# Altium PCB ZQS_PCB_Project.PcbDoc
Units mil, origin at the board's own origin, x right, y up, seen from the top; angles counter-clockwise.
Board outline 3900 x 3900 mil, 2 copper layers (Top Layer, Bottom Layer); 53 components, 55 nets, 204 pads, 926 vias.
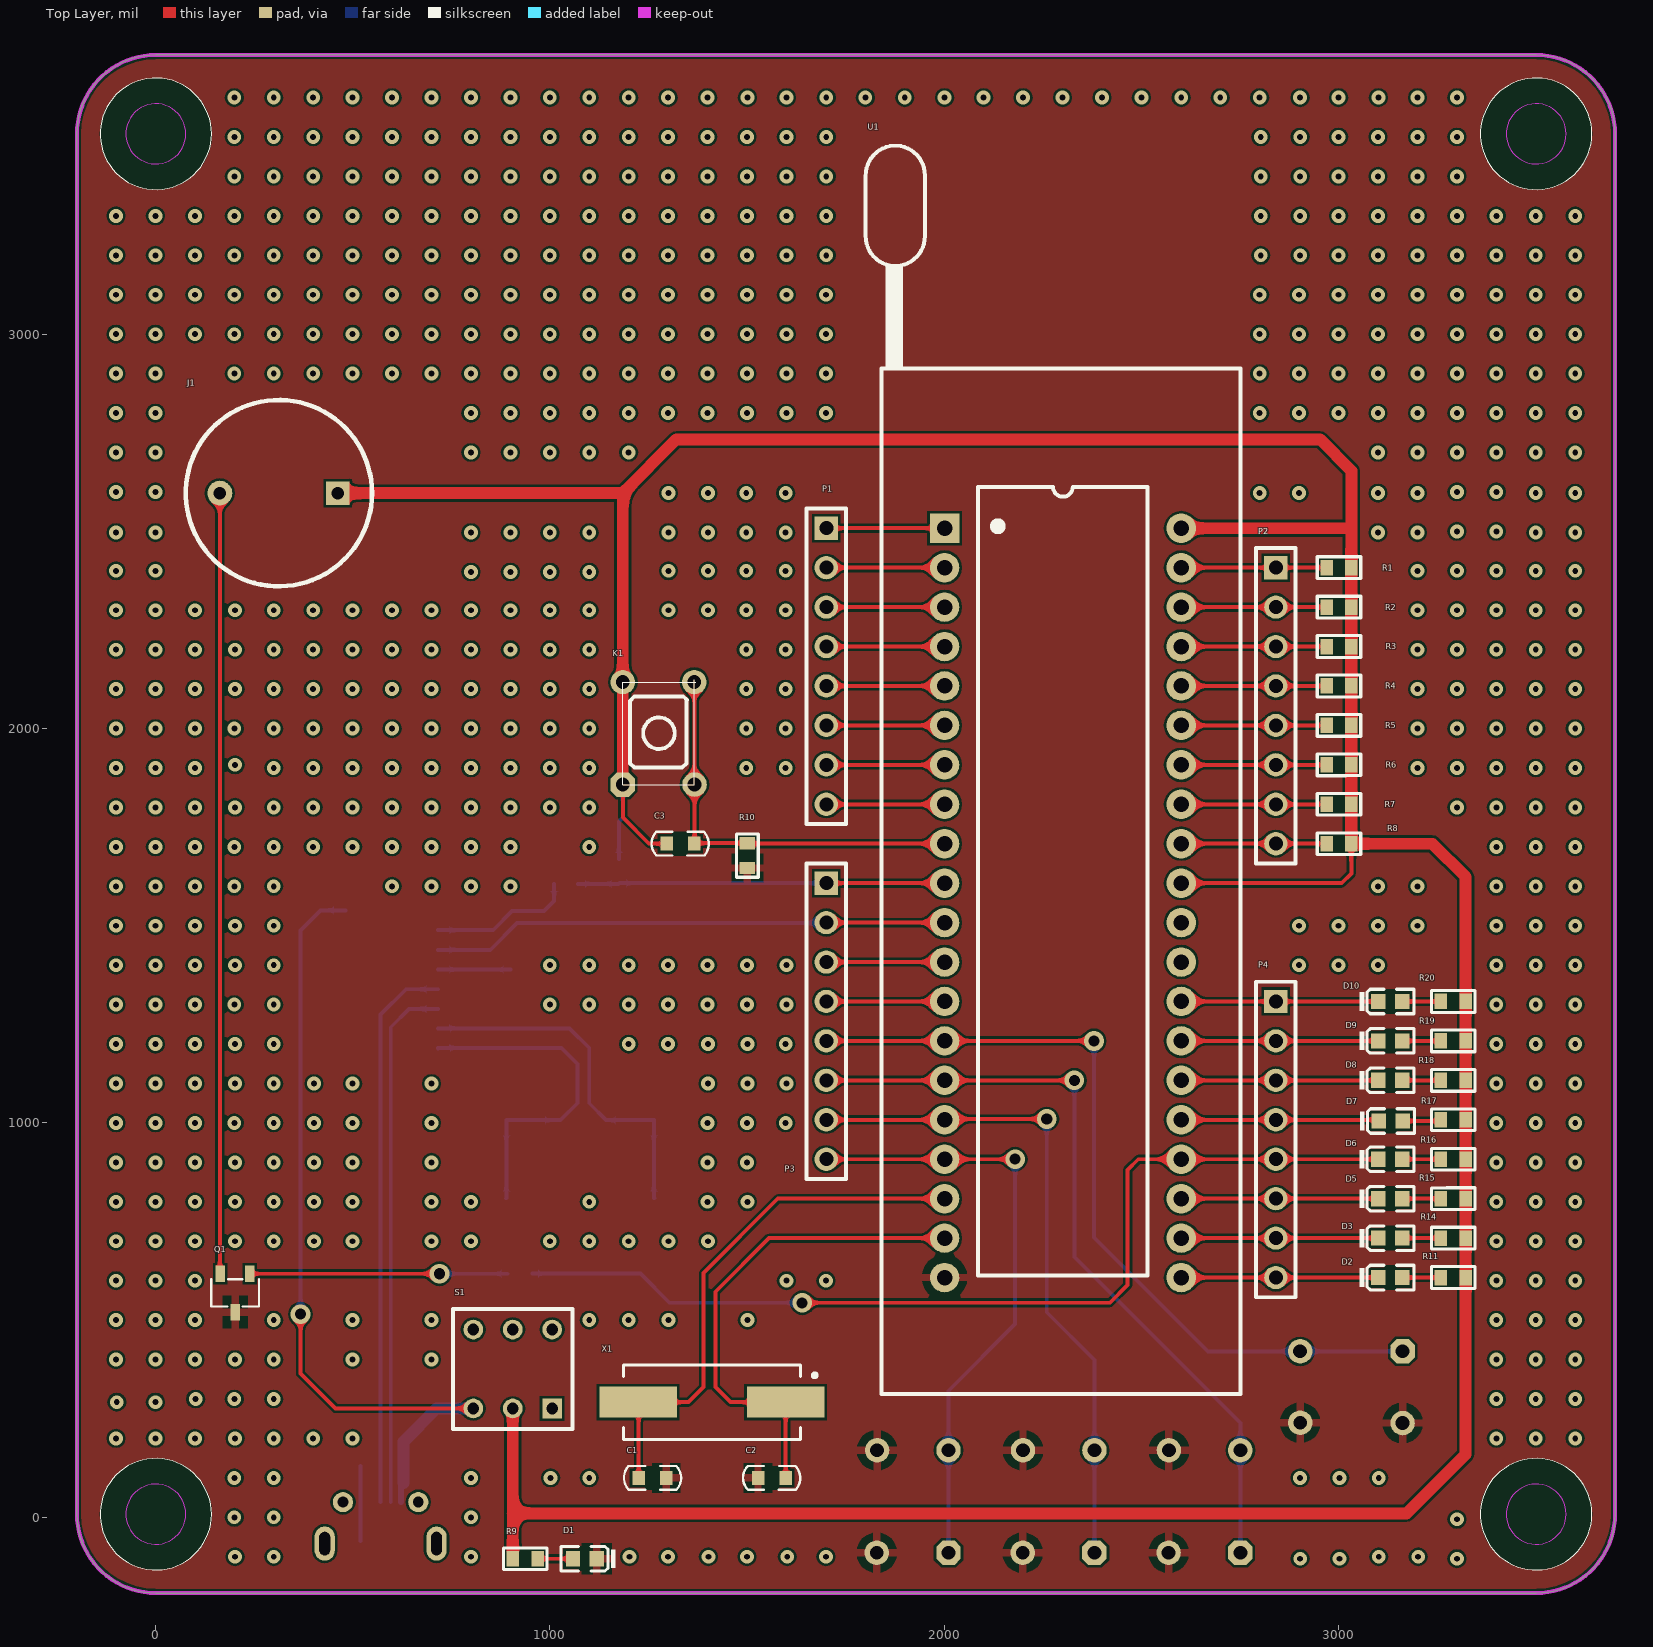
[diagram p0: Top Layer view]
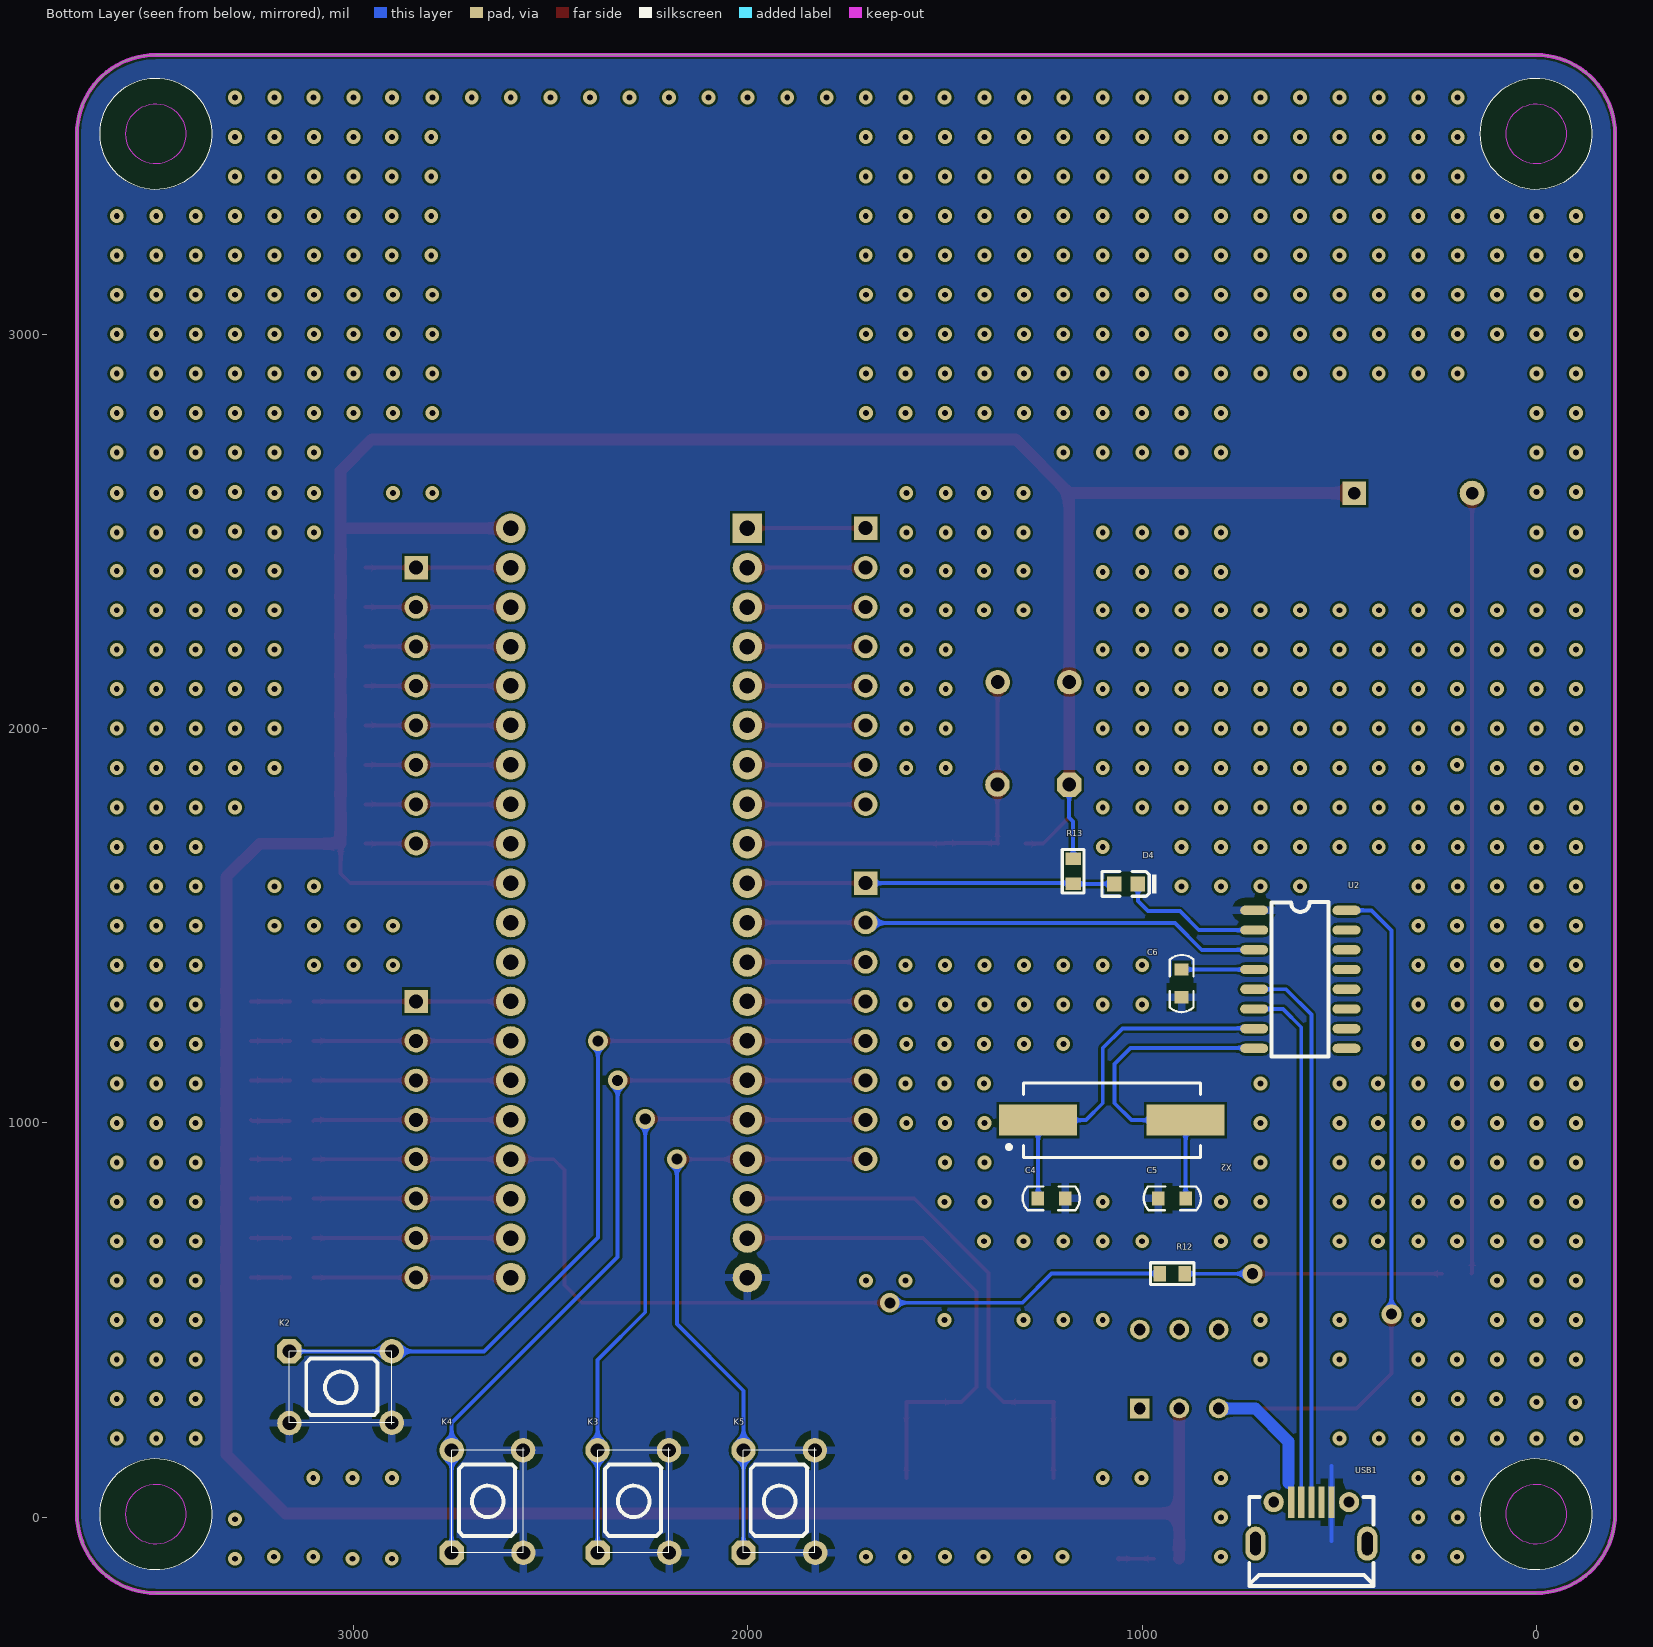
[diagram p1: Bottom Layer view, seen from below]

## Layer stack, top to bottom
Top Layer: signal copper 1.4
Dielectric: dielectric 12.6, FR-4, Dk 4.8
Bottom Layer: signal copper 1.4

## Board outline
1,-192 cw(c1,8) -199,8 -199,3508 cw(c1,3508) 1,3708 3501,3708 cw(c3501,3508) 3701,3508 3701,8 cw(c3501,8) 3501,-192

## Design rules (kind name [scope] priority, off if disabled: settings)
Clearance [All] p1: gap=6
PolygonConnect [All vs IsVia] p1: connectstyle=Relief reliefconductorwidth=10 reliefentries=4 polygonreliefangle="90 Angle" airgapwidth=10
PolygonConnect PolygonConnect_1 [All] p2: connectstyle=Relief reliefconductorwidth=20 reliefentries=4 polygonreliefangle="90 Angle" airgapwidth=20
RoutingVias [All] p1: holewidth=28 width=50 viastyle="Through Hole" minholewidth=8 minwidth=25 maxholewidth=28 maxwidth=50
SolderMaskExpansion [All] p1: expansion=4
Width VCC [InNet('VCC')] p1: maxlimit=30 minlimit=10 preferedwidth=30
Width GND [InNet('GND')] p2: maxlimit=40 minlimit=10 preferedwidth=40
Width [All] p3: maxlimit=40 minlimit=10 preferedwidth=10
28 further rules are at their usual default settings.

## Components (designator, comment, footprint, x,y, rotation, side; value= is the part's Value field where it differs from the comment)
C1 "22pF" C0603 1260,100 r180 top
C2 "22pF" C0603 1563,100 r0 top
C3 "10uF" C0603 1331,1708 r0 top
C4 "22pF" C0603 1230,809 r180 bottom
C5 "22pF" C0603 924,809 r0 bottom
C6 "0.1uF" C0603 900,1354 r90 bottom
D1 "LED" LED-G 1089,-105 r0 top
D2 "LED" LED-B 3131,608 r180 top
D3 "LED" LED-B 3131,708 r180 top
D4 "LED" LED-G 1041,1606 r180 bottom
D5 "LED" LED-G 3131,808 r180 top
D6 "LED" LED-G 3131,908 r180 top
D7 "LED" LED-R 3132,1005 r180 top
D8 "LED" LED-R 3131,1108 r180 top
D9 "LED" LED-Y 3131.16,1208 r180 top
D10 "LED" LED-Y 3131.16,1308 r180 top
J1 "Buzzer" Buzzer 313,2597 r0 top
K1 "KEY" KEY 1276.05,1987.88 r0 top
K2 "KEY" KEY 3032.5,330 r270 bottom
K3 "KEY" KEY 2290,40 r180 bottom
K4 "KEY" KEY 2660,40 r180 bottom
K5 "KEY" KEY 1920,40 r180 bottom
P1 "Header" HDR2.54-M-LI-8P 1701,2508 r270 top
P2 "Header" HDR2.54-M-LI-8P 2841,2408 r270 top
P3 "Header" HDR2.54-M-LI-8P 1701,1608 r270 top
P4 "Header" HDR2.54-M-LI-8P 2841,1308 r270 top
Q1 "8550" SOT-23-3 202,569 r90 top
R1 "1K" R0603 3001,2408 r0 top
R2 "1K" R0603 3001,2308 r0 top
R3 "1K" R0603 3001,2208 r0 top
R4 "1K" R0603 3001,2108 r0 top
R5 "1K" R0603 3001,2008 r0 top
R6 "1K" R0603 3001,1908 r0 top
R7 "1K" R0603 3001,1808 r0 top
R8 "1K" R0603 3001,1708 r0 top
R9 "1K" R0603 938,-105 r0 top
R10 "10K" R0603 1501,1678 r270 top
R11 "1K" R0603 3291,608 r180 top
R12 "1K" R0603 924,618 r180 bottom
R13 "10K" R0603 1175,1638 r90 bottom
R14 "1K" R0603 3291,708 r180 top
R15 "1K" R0603 3291,808 r180 top
R16 "1K" R0603 3291,908 r180 top
R17 "1K" R0603 3291,1008 r180 top
R18 "1K" R0603 3291,1108 r180 top
R19 "1K" R0603 3291,1208 r180 top
R20 "1K" R0603 3291,1308 r180 top
S1 "" swtich-6pin 1006,276 r0 top
U1 "STC89C5xx" STC89C5X 2301,1558 r0 top
U2 "CH340G" SOIC-16_150mil 599,1364 r270 bottom
USB1 "USB-MINI/MICRO" USB-MICRO2 571,-14 r270 bottom
X1 "12MHZ" XTAL_HC49SMD 1598,292 r180 top
X2 "11.0592MHZ" XTAL_HC49SMD 1264,1007 r180 bottom

## Footprints (in the part's own frame and the unit in brackets; to place one, negate y for a bottom-side part, rotate by r counter-clockwise, add the part's x,y. Pads: shape width x height; smd on the part's side, far side on the other; paste and mask are expansions set on the pad)
Buzzer [mm]
  rect 1.5x1.5 hole 0.8: 1(3.8,0)
  round 1.6 hole 0.8: 2(-3.8,0)
  silkscreen extent -6,-6 6,6, body extent -6,-6 9.45,6, height 9.75
C0603 [mm]
  rect 0.8x0.9 smd: 1(-0.889,0) 2(0.889,0)
  Top Layer pour cut-out: -0.508,0.762 0.457,0.762 0.457,-0.75 0.445,-0.762 -0.508,-0.762
  silkscreen extent -1.86,-0.76 1.82,0.76, body extent -0.75,-0.39 0.85,0.41, height 0.45
HDR2.54-M-LI-8P [mm]
  rect 1.5x1.5 hole 0.9: 1(0,0)
  round 1.5 hole 0.9: 2(2.54,0) 3(5.08,0) 4(7.62,0) 5(10.16,0) 6(12.7,0) 7(15.24,0) 8(17.78,0)
  silkscreen extent -1.27,-1.27 19.05,1.27, body extent -1.27,-1.27 19.05,1.27, height 8.54
KEY [mil]
  oct 62x62 hole 35: 1(-90.95,-129.96)
  round 62 hole 35: 1(-90.94,129.96) 2(90.16,129.88) 2(90.95,-129.88)
  silkscreen extent -91,-130 94,136, body extent -123,-156 121,156, height 157
LED-B [mm]
  rect 0.93x0.98 smd: 1(-0.766,0) 2(0.766,0)
  Top Layer pour cut-out: -0.404,0.79 -0.404,-0.79 0.396,-0.79 0.396,0.79
  silkscreen extent -1.54,-0.79 1.97,0.79, body extent -0.8,-0.4 0.8,0.4, height 0.6
LED-G [mm]
  rect 0.93x0.98 smd: 1(-0.766,0) 2(0.766,0)
  Top Layer pour cut-out: -0.404,0.79 -0.404,-0.79 0.396,-0.79 0.396,0.79
  silkscreen extent -1.54,-0.79 1.97,0.79, body extent -0.8,-0.4 0.8,0.4, height 0.6
LED-R [mm]
  rect 0.93x0.98 smd: 1(-0.766,0) 2(0.766,0)
  Top Layer pour cut-out: -0.404,0.79 -0.404,-0.79 0.396,-0.79 0.396,0.79
  silkscreen extent -1.54,-0.79 1.97,0.79, body extent -0.8,-0.4 0.8,0.4, height 0.6
LED-Y [mm]
  rect 0.93x0.98 smd: 1(-0.762,0) 2(0.77,0)
  Top Layer pour cut-out: -0.4,0.79 -0.4,-0.79 0.4,-0.79 0.4,0.79
  silkscreen extent -1.53,-0.79 1.97,0.79, body extent -0.8,-0.4 0.8,0.4, height 0.6
R0603 [mm]
  rect 0.8x1 smd: 1(-0.8,0) 2(0.8,0)
  Top Layer pour cut-out: -0.432,0.7 -0.432,-0.7 0.451,-0.7 0.451,0.681 0.432,0.7
  silkscreen extent -1.4,-0.7 1.4,0.7, body extent -0.8,-0.37 0.8,0.43, height 0.45
SOIC-16_150mil [mm]
  oval 0.6x1.8 smd: 1(-4.445,-2.972) 2(-3.175,-2.972) 3(-1.905,-2.972) 4(-0.635,-2.972) 5(0.635,-2.972) 6(1.905,-2.972) 7(3.175,-2.972) 8(4.445,-2.972) 9(4.445,2.972) 10(3.175,2.972) 11(1.905,2.972) 12(0.635,2.972) 13(-0.635,2.972) 14(-1.905,2.972) 15(-3.175,2.972) 16(-4.445,2.972)
  silkscreen extent -4.98,-1.85 4.98,1.83, body extent -5.1,-3.03 5.1,2.97, height 1.7
SOT-23-3 [mm]
  rect 1.07x0.6 smd mask+0.051: 1(1.235,-0.95) 2(1.235,0.95) 3(-1.235,0)
  silkscreen extent -0.88,-1.54 0.88,1.54, body extent -1.12,-1.51 1.38,1.49, height 1.08
STC89C5X [mm]
  rect 1.9x1.9 hole 1: 1(-7.62,24.13)
  round 1.9 hole 1: 2(-7.62,21.59) 3(-7.62,19.05) 4(-7.62,16.51) 5(-7.62,13.97) 6(-7.62,11.43) 7(-7.62,8.89) 8(-7.62,6.35) 9(-7.62,3.81) 10(-7.62,1.27) 11(-7.62,-1.27) 12(-7.62,-3.81) 13(-7.62,-6.35) 14(-7.62,-8.89) 15(-7.62,-11.43) 16(-7.62,-13.97) 17(-7.62,-16.51) 18(-7.62,-19.05) 19(-7.62,-21.59) 20(-7.62,-24.13) 21(7.62,-24.13) 22(7.62,-21.59) 23(7.62,-19.05) 24(7.62,-16.51) 25(7.62,-13.97) 26(7.62,-11.43) 27(7.62,-8.89) 28(7.62,-6.35) 29(7.62,-3.81) 30(7.62,-1.27) 31(7.62,1.27) 32(7.62,3.81) 33(7.62,6.35) 34(7.62,8.89) 35(7.62,11.43) 36(7.62,13.97) 37(7.62,16.51) 38(7.62,19.05) 39(7.62,21.59) 40(7.62,24.13)
  silkscreen extent -12.7,-31.62 11.43,48.76, body extent -12.84,-31.38 11.31,49.02, height 16.64
swtich-6pin [mil]
  rect 50x50 hole 30: 1(0,0)
  round 50 hole 30: 2(-100,0) 3(-200,0) 4(-200,200) 5(-100,200) 6(0,200)
  silkscreen extent -252,-52 52,252, body extent -257,-57 57,257, height 355
USB-MICRO2 [mm]
  rect 2x0.4 smd: 1(-1.327,-1.3) 2(-1.327,-0.65) 3(-1.327,0) 4(-1.327,0.65) 5(-1.327,1.3)
  round 1.3 hole 0.7: 6(-1.335,2.425) 9(-1.335,-2.425)
  oval 2.2x1.3 hole 0.7 slot 1.5 at 0 deg: 7(1.335,3.6) 8(1.335,-3.6)
  silkscreen extent -1.68,-4 4.07,4, body extent -1.94,-4.34 3.96,4.31, height 2.76
XTAL_HC49SMD [mm]
  rect 5x2 smd: 1(0,0) 2(9.5,0)
  silkscreen extent -2,-2.4 10.45,2.4, body extent -1.95,-2.46 11.45,2.44, height 4

## Part data
C1 C2 C3 C4 C5 C6: library part CAP
P1 P2 P3 P4: library part Header1x8
Q1: library part Triode-3
R1 R2 R3 R4 R5 R6 R7 R8 R9 R10 R11 R12 R13 R14 R15 R16 R17 R18 R19 R20: library part RES
S1: library part SWITCH-6PIN
USB1: library part USB-MICRO
X1 X2: library part XTAL

## Via types
v1: diameter 35, hole 15, Top Layer to Bottom Layer, 919 vias
v2: diameter 50, hole 28, Top Layer to Bottom Layer, 7 vias

## Nets (pads, with @x,y where several pads share a name; then routed paths per layer and width w, separated by ;. In a path a pad name is that pad's centre, name@x,y a point inside that pad or via, vN(x,y) a via of type N, cw(c..) or ccw(c..) an arc to the next point about the centre after c; other vN are vias at no path point)
GND: C1.1 C2.1 C4.2 C5.2 C6.1 D1.2 K2.2 K3.2 K4.2 K5.2 Q1.3 R10.2 U1.20 U2.1 USB1.5 | length 190.1
  Bottom Layer w10: 520,-60 519.82,-59.82 USB1.5 519.82,129.82 520,130
NetC6_2: C6.2 U2.4 | length 184
  Bottom Layer w10: U2.4 C6.2
NetD1_1: D1.1 R9.2 | length 89.3
  Top Layer w10: R9.2 D1.1
NetD2_1: D2.1 R11.2 | length 98.3
  Top Layer w10: D2.1 R11.2
NetD3_1: D3.1 R14.2 | length 98.3
  Top Layer w10: D3.1 R14.2
NetD4_2: D4.2 U2.2 | length 368.6
  Bottom Layer w10: U2.2 856.57,1489 904.57,1537 985,1537 1010.84,1562.84 D4.2
NetD5_1: D5.1 R15.2 | length 98.3
  Top Layer w10: D5.1 R15.2
NetD6_1: D6.1 R16.2 | length 98.3
  Top Layer w10: D6.1 R16.2
NetD7_1: D7.1 R17.2 | length 98.6
  Top Layer w10: D7.1 3256.5,1005 R17.2
NetD8_1: D8.1 R18.2 | length 98.3
  Top Layer w10: D8.1 R18.2
NetD9_1: D9.1 R19.2 | length 98.3
  Top Layer w10: D9.1 R19.2
NetD10_1: D10.1 R20.2 | length 98.3
  Top Layer w10: D10.1 R20.2
NetJ1_2: J1.2 Q1.2 | length 1981
  Top Layer w10: J1.2 163.39,618.83 Q1.2 ; J1.2@164.6,2609.21 J1.2@165.39,2610
NetQ1_1: Q1.1 R12.2 | length 652.7
  Top Layer w10: Q1.1 v2(720,617.62)
  Bottom Layer w10: v2(720,617.62) R12.2@892.13,617.62
P00: P2.1 R1.1 U1.39 | length 368.5
  Top Layer w10: U1.39 P2.1 R1.1
P01: P2.2 R2.1 U1.38 | length 368.5
  Top Layer w10: U1.38 P2.2 R2.1
P02: P2.3 R3.1 U1.37 | length 368.5
  Top Layer w10: U1.37 P2.3 R3.1
P03: P2.4 R4.1 U1.36 | length 368.5
  Top Layer w10: U1.36 P2.4 R4.1
P04: P2.5 R5.1 U1.35 | length 368.5
  Top Layer w10: U1.35 P2.5 R5.1
P05: P2.6 R6.1 U1.34 | length 368.5
  Top Layer w10: U1.34 P2.6 R6.1
P06: P2.7 R7.1 U1.33 | length 368.5
  Top Layer w10: U1.33 P2.7 R7.1
P07: P2.8 R8.1 U1.32 | length 368.5
  Top Layer w10: U1.32 P2.8 R8.1
P10: P1.1 U1.1 | length 300
  Top Layer w10: P1.1 U1.1
P11: P1.2 U1.2 | length 300
  Top Layer w10: P1.2 U1.2
P12: P1.3 U1.3 | length 300
  Top Layer w10: P1.3 U1.3
P13: P1.4 U1.4 | length 300
  Top Layer w10: P1.4 U1.4
P14: P1.5 U1.5 | length 300
  Top Layer w10: P1.5 U1.5
P15: P1.6 U1.6 | length 300
  Top Layer w10: P1.6 U1.6
P16: P1.7 U1.7 | length 300
  Top Layer w10: P1.7 U1.7
P17: P1.8 U1.8 | length 300
  Top Layer w10: P1.8 U1.8
P20: D2.2 P4.8 U1.21 | length 499.8
  Top Layer w10: U1.21 P4.8 D2.2
P21: D3.2 P4.7 U1.22 | length 499.8
  Top Layer w10: U1.22 P4.7 D3.2
P22: D5.2 P4.6 U1.23 | length 499.8
  Top Layer w10: U1.23 P4.6 D5.2
P23: D6.2 P4.5 R12.1 U1.24 | length 2497.8
  Top Layer w10: v2(1640,544) 2420,544 2465,589 2465,881 2492,908 U1.24 P4.5 D6.2
  Bottom Layer w10: R12.1 1230,618 1304,544 v2(1640,544)
P24: D7.2 P4.4 U1.25 | length 502.1
  Top Layer w10: U1.25 P4.4 3098.84,1008 D7.2
P25: D8.2 P4.3 U1.26 | length 499.8
  Top Layer w10: U1.26 P4.3 D8.2
P26: D9.2 P4.2 U1.27 | length 499.8
  Top Layer w10: U1.27 P4.2 D9.2
P27: D10.2 P4.1 U1.28 | length 499.8
  Top Layer w10: U1.28 P4.1 D10.2
P30: D4.1 P3.1 R13.1 U1.10 | length 928.6
  Top Layer w10: P3.1 U1.10
  Bottom Layer w10: D4.1 1174.5,1606 R13.1 ; R13.1@1176.5,1608 P3.1
P31: P3.2 U1.11 U2.3 | length 1313.6
  Top Layer w10: P3.2 U1.11
  Bottom Layer w10: U2.3 849,1439 917,1507 1700,1507 P3.2
P32: P3.3 U1.12 | length 300
  Top Layer w10: P3.3 U1.12
P33: P3.4 U1.13 | length 300
  Top Layer w10: P3.4 U1.13
P34: K2.1 P3.5 U1.14 | length 2079.2
  Top Layer w10: P3.5 U1.14 v2(2380,1208)
  Bottom Layer w10: v2(2380,1208) 2380,710 2669.06,420.94 2902.53,420.94 K2.1@3162.46,420.94
P35: K4.1 P3.6 U1.15 | length 2001.3
  Top Layer w10: P3.6 U1.15 v2(2330,1108)
  Bottom Layer w10: v2(2330,1108) 2330,660 2750.94,239.06 2750.94,169.96 K4.1@2750.95,-89.96
P36: K3.1 P3.7 U1.16 | length 1709.9
  Top Layer w10: P3.7 U1.16 2003,1010 v2(2260,1010)
  Bottom Layer w10: v2(2260,1010) 2260,520 2380.94,399.06 2380.94,169.96 K3.1@2380.94,-89.96
P37: K5.1 P3.8 U1.17 | length 1547
  Top Layer w10: P3.8 U1.17 v2(2180,908)
  Bottom Layer w10: K5.1@2010.94,-89.96 2010.94,169.96 2010.94,320.94 2180,490 v2(2180,908)
RST: C3.2 K1.2 R10.1 U1.9 | length 1045.3
  Top Layer w10: C3.2 C3.2@1367,1709 ; K1.2@1366.21,2117.76 1366.61,2117.36 1366.61,1858.39 1367,1858 C3.2@1367,1709 ; U1.9 1502.5,1708 R10.1 1367.5,1709.5 C3.2@1367,1709
UD+: U2.5 USB1.3 | length 1408.3
  Bottom Layer w10: USB1.3 571,1275 635,1339 U2.5
UD-: U2.6 USB1.2 | length 1343
  Bottom Layer w10: USB1.2 596.59,1242.59 643,1289 U2.6
VCC: C3.1 J1.1 K1.1 R1.2 R2.2 R3.2 R4.2 R5.2 R6.2 R7.2 R8.2 R9.1 R11.1 R13.2 R14.1 R15.1 R16.1 R17.1 R18.1 R19.1 R20.1 S1.2 U1.31 U1.40 | length 10350.1
  Top Layer w10: K1.1@1185.11,1857.91 1185.11,1774.89 1252,1708 C3.1 ; U1.31 3008,1608 3032.5,1632.5 R8.2
  Top Layer w30: J1.1 1185,2597 1185.11,2597.11 ; S1.2 906,10 ; R9.1 906,-104.5 906,10 ; K1.1@1185.11,1857.92 1185.11,2117.84 1185.11,2597.11 ; U1.40 3027.99,2508 ; 906,10 3172.5,10 3322,159.5 3322,1624 3238,1708 R8.2 R7.2 R6.2 R5.2 R4.2 R3.2 R2.2 R1.2 3032.5,2653.5 2953,2733 1321,2733 1185.11,2597.11
  Bottom Layer w10: R13.2 1175,1764 1185.11,1774.11 K1.1@1185.11,1857.91
VCC_5V: S1.3 U2.16 USB1.1 | length 2101.4
  Top Layer w10: v2(368,515) 368,365 457,276 S1.3
  Bottom Layer w10: v2(368,515) 368,1488 419,1539 U2.16
  Bottom Layer w15: USB1.1 622.18,80.18 629,87
  Bottom Layer w30: 629,87 629,192 713,276 S1.3
X1: C2.2 U1.19 X1.1 | length 1265.1
  Top Layer w10: C2.2 X1.1 1458,292 1420,330 1420,572 1556,708 U1.19
X2: C1.2 U1.18 X1.2 | length 1353
  Top Layer w10: C1.2 1225,290.99 X1.2 1352,292 1390,330 1390,620 1578,808 U1.18
XI: C4.1 U2.7 X2.1 | length 923.9
  Bottom Layer w10: U2.7@717,1240 1050,1240 1100,1190 1100,1050 1143,1007 X2.1 1264,810 C4.1
XO: C5.1 U2.8 X2.2 | length 867.2
  Bottom Layer w10: U2.8 717,1190 1030,1190 1070,1150 1070,1050 1027,1007 X2.2 889.99,809.99 C5.1
pads on no net: S1.1 S1.4 S1.5 S1.6 U1.29 U1.30 U2.9 U2.10 U2.11 U2.12 U2.13 U2.14 U2.15 USB1.4 USB1.6 USB1.7 USB1.8 USB1.9
copper on no net:
  other v1: 2902.62,-105 2902.62,-105 3002.62,-105 3002.62,-105 3300,-105 3300,-105 202,-100 300,-100 800,-100 1202,-100 1202,-100 1300,-100 1300,-100 1402,-100 1402,-100 1500,-100 1500,-100 1602,-100 1602,-100 1700,-100 1700,-100 3101.84,-100 3101.84,-100 3201.84,-100 3201.84,-100 3300,-5 3300,-5 200,0 300,0 800,0 200,100 300,100 800,100 1002,100 1002,100 1100,100 1100,100 2902.53,100 2902.53,100 3002.53,100 3002.53,100 3101.84,100 -100,200 0,200 100,200 202,200 300,200 400,200 500,200 3400,200 3500,200 3600,200 -98,292 -98,292 0,292 0,292 102,300 102,300 200,300 200,300 300,300 3400,300 3400,300 3500,300 3500,300 3600,300 3600,300 -100,400 0,400 100,400 202,400 300,400 500,400 700,400 3400,400 3500,400 3600,400 -100,500 0,500 0,500 100,500 100,500 300,500 500,500 700,500 1100,500 1200,500 1301,500 1501,500 3400,500 3400,500 3500,500 3500,500 3600,500 3600,500 -100,600 0,600 100,600 1600,600 1700,600 3400,600 3500,600 3600,600 -100,700 0,700 0,700 100,700 100,700 202,700 202,700 300,700 300,700 402,700 402,700 500,700 500,700 700,700 800,700 1000,700 1100,700 1200,700 1301,700 1401,700 3400,700 3400,700 3500,700 3500,700 3600,700 3600,700 -100,800 0,800 100,800 202,800 202,800 300,800 300,800 402,800 402,800 500,800 500,800 700,800 800,800 1100,800 1400,800 1501,800 3400,800 3500,800 3600,800 -100,900 0,900 0,900 100,900 100,900 202,900 202,900 300,900 300,900 402,900 402,900 500,900 500,900 700,900 1400,900 1500,900 3400,900 3500,900 3600,900 -100,1000 0,1000 100,1000 200,1000 300,1000 402,1000 402,1000 500,1000 500,1000 700,1000 1400,1000 1400,1000 1500,1000 1500,1000 1598,1000 3400,1000 3500,1000 3600,1000 -100,1100 0,1100 0,1100 100,1100 100,1100 202,1100 202,1100 300,1100 300,1100 402,1100 402,1100 500,1100 500,1100 700,1100 1401,1100 1501,1100 1600,1100 3400,1100 3500,1100 3600,1100 -100,1200 0,1200 100,1200 202,1200 202,1200 300,1200 300,1200 1200,1200 1300,1200 1401,1200 1401,1200 1501,1200 1501,1200 1598,1200 3400,1200 3500,1200 3600,1200 -100,1300 0,1300 0,1300 100,1300 100,1300 200,1300 300,1300 1000,1300 1100,1300 1200,1300 1300,1300 1400,1300 1500,1300 1600,1300 3400,1300 3500,1300 3600,1300 -100,1400 0,1400 100,1400 202,1400 202,1400 300,1400 300,1400 1000,1400 1100,1400 1100,1400 1200,1400 1200,1400 1300,1400 1300,1400 1400,1400 1400,1400 1500,1400 1500,1400 1600,1400 1600,1400 2900,1400 2900,1400 3000,1400 3000,1400 3100,1400 3100,1400 3400,1400 3500,1400 3600,1400 -100,1500 0,1500 0,1500 100,1500 100,1500 202,1500 202,1500 300,1500 300,1500 2900,1500 3000,1500 3100,1500 3200,1500 3200,1500 3400,1500 3500,1500 3600,1500 -100,1600 0,1600 100,1600 200,1600 300,1600 600,1600 700,1600 800,1600 900,1600 3100,1600 3200,1600 3200,1600 3400,1600 3500,1600 3600,1600 -100,1700 0,1700 0,1700 100,1700 100,1700 200,1700 200,1700 300,1700 300,1700 400,1700 500,1700 600,1700 600,1700 700,1700 700,1700 800,1700 900,1700 1100,1700 3400,1700 3400,1700 3500,1700 3500,1700 3600,1700 3600,1700 -100,1800 0,1800 100,1800 202,1800 300,1800 400,1800 500,1800 600,1800 700,1800 800,1800 900,1800 1000,1800 1100,1800 3300,1800 3400,1800 3500,1800 3600,1800 -100,1900 0,1900 0,1900 100,1900 100,1900 300,1900 300,1900 400,1900 400,1900 500,1900 500,1900 600,1900 600,1900 700,1900 700,1900 800,1900 800,1900 900,1900 900,1900 1000,1900 1000,1900 1100,1900 1498,1900 1598,1900 3200,1900 3200,1900 3300,1900 3300,1900 3400,1900 3400,1900 3500,1900 3500,1900 3600,1900 3600,1900 202,1908 -100,2000 0,2000 100,2000 200,2000 300,2000 400,2000 500,2000 600,2000 700,2000 800,2000 900,2000 1000,2000 1100,2000 1498,2000 1498,2000 1598,2000 1598,2000 3200,2000 3300,2000 3400,2000 3500,2000 3600,2000 -100,2100 0,2100 0,2100 100,2100 100,2100 202,2100 300,2100 300,2100 400,2100 400,2100 500,2100 500,2100 600,2100 600,2100 700,2100 700,2100 800,2100 800,2100 900,2100 900,2100 1000,2100 1000,2100 1100,2100 1100,2100 1498,2100 1598,2100 3200,2100 3200,2100 3300,2100 3300,2100 3400,2100 3400,2100 3500,2100 3500,2100 3600,2100 3600,2100 -100,2200 0,2200 100,2200 202,2200 300,2200 400,2200 500,2200 600,2200 700,2200 800,2200 900,2200 1000,2200 1100,2200 1498,2200 1498,2200 1598,2200 1598,2200 3200,2200 3300,2200 3400,2200 3500,2200 3600,2200 -100,2300 0,2300 0,2300 100,2300 100,2300 202,2300 300,2300 300,2300 400,2300 400,2300 500,2300 500,2300 600,2300 600,2300 700,2300 700,2300 800,2300 800,2300 900,2300 900,2300 1000,2300 1000,2300 1100,2300 1100,2300 1301,2300 1401,2300 1498,2300 1598,2300 3200,2300 3200,2300 3300,2300 3300,2300 3400,2300 3400,2300 3500,2300 3500,2300 3600,2300 3600,2300 800,2397 900,2397 1000,2397 1100,2397 -100,2400 -100,2400 0,2400 0,2400 1301,2400 1301,2400 1401,2400 1401,2400 1498,2400 1498,2400 1598,2400 1598,2400 3200,2400 3300,2400 3400,2400 3500,2400 3600,2400 -100,2497 -100,2497 0,2497 0,2497 800,2497 800,2497 900,2497 900,2497 1000,2497 1000,2497 1100,2497 1100,2497 1301,2497 1401,2497 1498,2497 1598,2497 3100,2497 3100,2497 3200,2497 3500,2497 3500,2497 3600,2497 3300,2500 3300,2500 3400,2500 1301,2597 1301,2597 1401,2597 1401,2597 1498,2597 1498,2597 1598,2597 1598,2597 2800,2597 2800,2597 2900,2597 2900,2597 3100,2597 3200,2597 3500,2597 3600,2597 -100,2600 -100,2600 0,2600 0,2600 3300,2600 3400,2600 -100,2700 -100,2700 0,2700 0,2700 800,2700 900,2700 1000,2700 1100,2700 1200,2700 1200,2700 3100,2700 3200,2700 3200,2700 3300,2700 3400,2700 3400,2700 3500,2700 3600,2700 -100,2800 -100,2800 0,2800 0,2800 800,2800 800,2800 900,2800 900,2800 1000,2800 1000,2800 1100,2800 1100,2800 1200,2800 1200,2800 1300,2800 1400,2800 1500,2800 1600,2800 1700,2800 1700,2800 2800,2800 2800,2800 2900,2800 3000,2800 3000,2800 3100,2800 3200,2800 3300,2800 3400,2800 3400,2800 3500,2800 3600,2800 3600,2800 -100,2900 -100,2900 0,2900 0,2900 200,2900 200,2900 300,2900 300,2900 400,2900 400,2900 500,2900 500,2900 600,2900 600,2900 700,2900 700,2900 800,2900 800,2900 900,2900 900,2900 1000,2900 1000,2900 1100,2900 1200,2900 1300,2900 1300,2900 1400,2900 1400,2900 1500,2900 1500,2900 1600,2900 1600,2900 1700,2900 1700,2900 2800,2900 2900,2900 3000,2900 3100,2900 3200,2900 3200,2900 3300,2900 3400,2900 3500,2900 3600,2900 -100,3000 -100,3000 0,3000 100,3000 200,3000 300,3000 400,3000 500,3000 600,3000 700,3000 800,3000 900,3000 1000,3000 1100,3000 1100,3000 1200,3000 1200,3000 1300,3000 1400,3000 1500,3000 1600,3000 1700,3000 1700,3000 2800,3000 2800,3000 2900,3000 3000,3000 3000,3000 3100,3000 3200,3000 3300,3000 3400,3000 3400,3000 3500,3000 3600,3000 3600,3000 -100,3100 -100,3100 0,3100 0,3100 100,3100 100,3100 200,3100 200,3100 300,3100 300,3100 400,3100 400,3100 500,3100 500,3100 600,3100 600,3100 700,3100 700,3100 800,3100 800,3100 900,3100 900,3100 1000,3100 1000,3100 1100,3100 1200,3100 1300,3100 1300,3100 1400,3100 1400,3100 1500,3100 1500,3100 1600,3100 1600,3100 1700,3100 1700,3100 2800,3100 2900,3100 3000,3100 3100,3100 3200,3100 3200,3100 3300,3100 3400,3100 3500,3100 3600,3100 -100,3200 -100,3200 0,3200 100,3200 200,3200 300,3200 400,3200 500,3200 600,3200 700,3200 800,3200 900,3200 1000,3200 1100,3200 1100,3200 1200,3200 1200,3200 1300,3200 1400,3200 1500,3200 1600,3200 1701,3200 1701,3200 2802.62,3200 2802.62,3200 2902.62,3200 3000,3200 3000,3200 3100,3200 3200,3200 3300,3200 3400,3200 3400,3200 3500,3200 3600,3200 3600,3200 -100,3300 -100,3300 0,3300 0,3300 100,3300 100,3300 200,3300 200,3300 300,3300 300,3300 400,3300 400,3300 500,3300 500,3300 600,3300 600,3300 700,3300 700,3300 800,3300 800,3300 900,3300 900,3300 1000,3300 1000,3300 1100,3300 1200,3300 1300,3300 1300,3300 1400,3300 1400,3300 1500,3300 1500,3300 1600,3300 1600,3300 1701,3300 1701,3300 2802.62,3300 2902.62,3300 3000,3300 3100,3300 3200,3300 3200,3300 3300,3300 3400,3300 3500,3300 3600,3300 200,3400 300,3400 400,3400 500,3400 600,3400 700,3400 800,3400 900,3400 1000,3400 1100,3400 1100,3400 1200,3400 1200,3400 1300,3400 1400,3400 1500,3400 1600,3400 1701,3400 1701,3400 2802.62,3400 2802.62,3400 2902.62,3400 3000,3400 3000,3400 3100,3400 3200,3400 3300,3400 200,3500 200,3500 300,3500 300,3500 400,3500 400,3500 500,3500 500,3500 600,3500 600,3500 700,3500 700,3500 800,3500 800,3500 900,3500 900,3500 1000,3500 1000,3500 1100,3500 1200,3500 1300,3500 1300,3500 1400,3500 1400,3500 1500,3500 1500,3500 1600,3500 1600,3500 1701,3500 1701,3500 2802.62,3500 2902.62,3500 3000,3500 3100,3500 3200,3500 3200,3500 3300,3500 200,3600 300,3600 400,3600 500,3600 600,3600 700,3600 800,3600 900,3600 1000,3600 1100,3600 1100,3600 1200,3600 1200,3600 1300,3600 1400,3600 1501,3600 1600,3600 1701,3600 1800,3600 1900,3600 2001,3600 2100,3600 2200,3600 2300,3600 2400,3600 2500,3600 2601,3600 2700,3600 2800,3600 2902.53,3600 3000,3600 3100.84,3600 3200,3600 3300,3600

## Polygon pours and split planes (outlines as drawn)
GND on Bottom Layer "Bottom Layer-GND" (solid, remove dead copper, pour order 5): 1,-192 cw(c1,8) -199,8 -199,3508 cw(c1,3508) 1,3708 3501,3708 cw(c3501,3508) 3701,3508 3701,8 cw(c3501,8) 3501,-192
GND on Top Layer "Top Layer-GND" (solid, remove dead copper, pour order 4): 1,-192 cw(c1,8) -199,8 -199,3508 cw(c1,3508) 1,3708 3501,3708 cw(c3501,3508) 3701,3508 3701,8 cw(c3501,8) 3501,-192

## Keep-outs
Keep-Out Layer:
  circle w1: c3501,3508 r76.16
  circle w1: c3501,8 r76.16
  circle w1: c1,8 r76.16
  circle w1: c1,3508 r76.16
  lines w10: -199,8 ccw(c1,8) 1,-192 3501,-192 ccw(c3501,8) 3701,8 3701,3508 ccw(c3501,3508) 3501,3708 1,3708 ccw(c1,3508) -199,3508 -199,8

## Other copper
Top Layer:
  pour cut-out: 3359.58,3508 cw(c3501,3508) 3501,3649.42 cw(c3501,3508) 3642.42,3508 cw(c3501,3508) 3501,3366.58 cw(c3501,3508)
  pour cut-out: 3501,149.42 cw(c3501,8) 3642.42,8 cw(c3501,8) 3501,-133.42 cw(c3501,8) 3359.58,8 cw(c3501,8)
  pour cut-out: 142.42,8 cw(c1,8) 1,-133.42 cw(c1,8) -140.42,8 cw(c1,8) 1,149.42 cw(c1,8)
  pour cut-out: 1,3366.58 cw(c1,3508) -140.42,3508 cw(c1,3508) 1,3649.42 cw(c1,3508) 142.42,3508 cw(c1,3508)
Bottom Layer:
  pour cut-out: 3359.58,3508 cw(c3501,3508) 3501,3649.42 cw(c3501,3508) 3642.42,3508 cw(c3501,3508) 3501,3366.58 cw(c3501,3508)
  pour cut-out: 3501,149.42 cw(c3501,8) 3642.42,8 cw(c3501,8) 3501,-133.42 cw(c3501,8) 3359.58,8 cw(c3501,8)
  pour cut-out: 142.42,8 cw(c1,8) 1,-133.42 cw(c1,8) -140.42,8 cw(c1,8) 1,149.42 cw(c1,8)
  pour cut-out: 1,3366.58 cw(c1,3508) -140.42,3508 cw(c1,3508) 1,3649.42 cw(c1,3508) 142.42,3508 cw(c1,3508)

## Silkscreen, mask and mechanical layers (free items; w line width, h text height)
Top Overlay:
  circle w1: c3501,3508 r141.42
  circle w1: c3501,8 r141.42
  circle w1: c1,8 r141.42
  circle w1: c1,3508 r141.42
Bottom Overlay:
  circle w1: c3501,3508 r141.42
  circle w1: c3501,8 r141.42
  circle w1: c1,8 r141.42
  circle w1: c1,3508 r141.42